# EAGLE board mainboard-v2 (EAGLE 8.0.2)
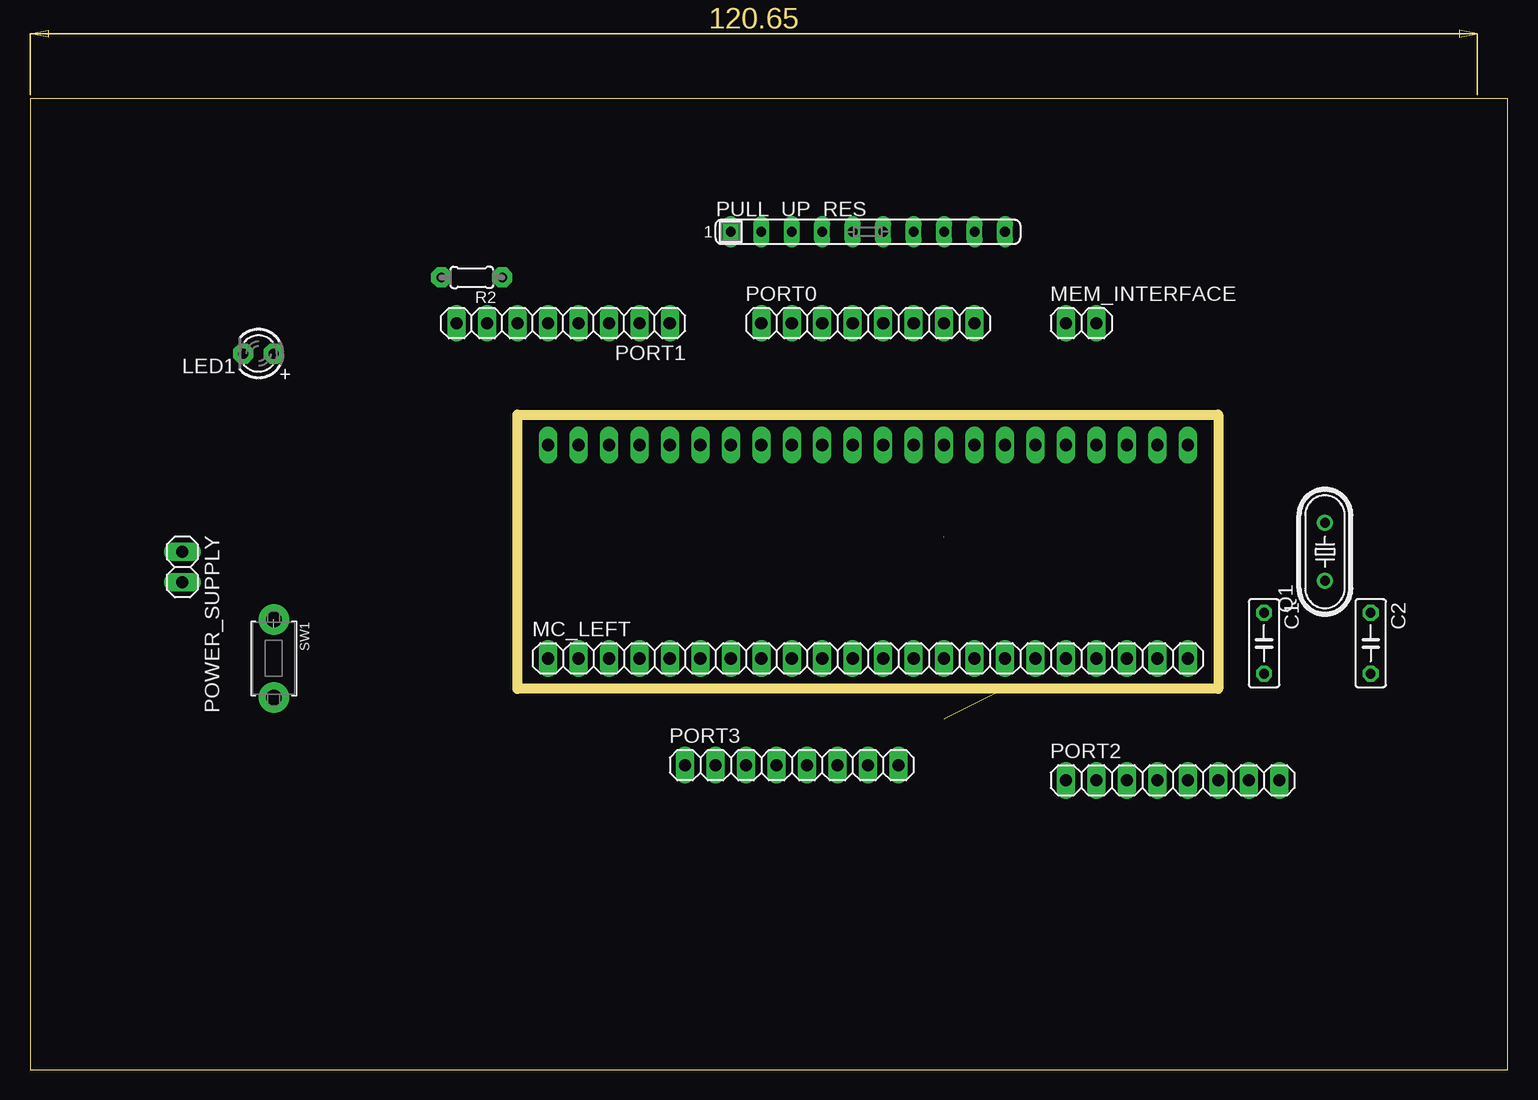
[diagram p0: board, top side]
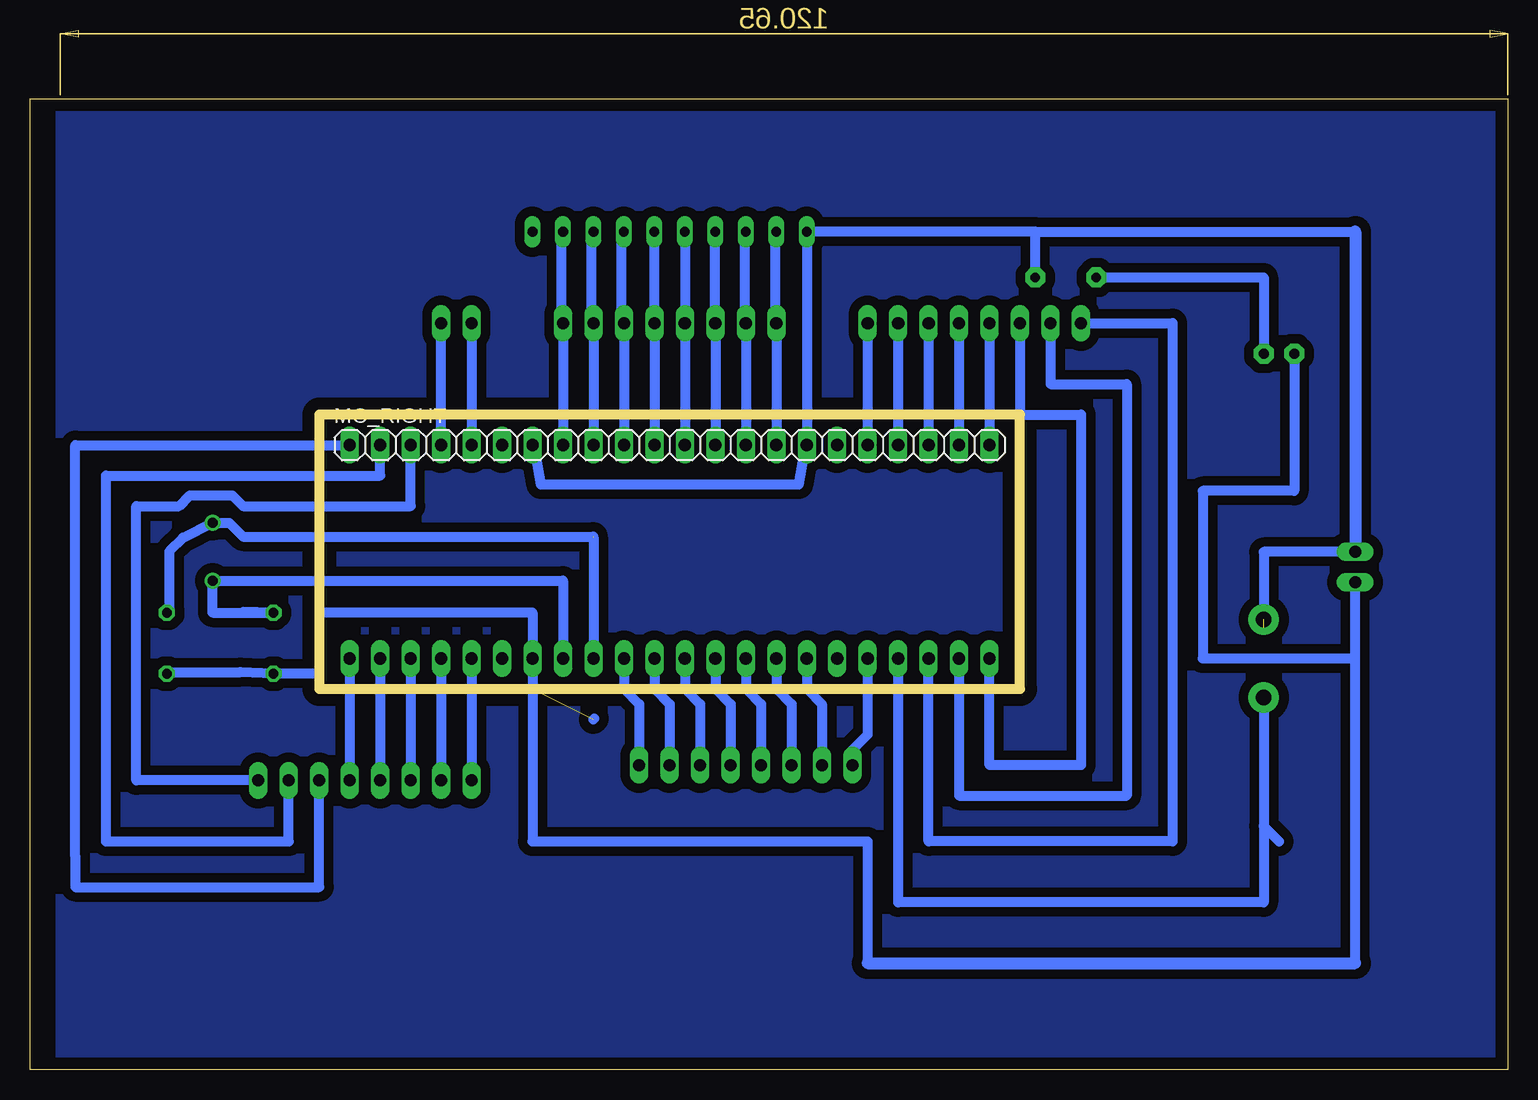
[diagram p1: board, bottom side, seen from below]

Size 123.17 x 80.95 mm. Coordinates in mm from the lower left corner, seen from the top.
Outline: 0,0 123.17,0 123.17,80.95 0,80.95 0,0
Outline: 40.64,54.61 99.06,54.61 99.06,31.75 40.64,31.75 40.64,54.61
Copper layers (1*16): Top 0.035mm / dielectric 1.5mm / Bottom 0.035mm
Design rules "default *": minimum track width 10mil, minimum drill 24mil, track to track 0.8mm, track to pad 1mm, pad to pad 8mil, via to via 8mil, smd to smd 8mil, copper to edge 40mil, drill to drill 8mil, minimum pad ring 10mil, minimum via ring 8mil, stop-mask expansion 4mil, vias tented up to drill 0mil, thermal gap 10mil

## Footprints (pad centres in the part's own frame; a part is rotated, then mirrored left to right if it is on the bottom)
C050-025X075 = drill 0.813 octagon: 1 -2.54,0; 2 2.54,0
LED3MM = drill 0.813 pad 1.676 octagon: A -1.27,0; K 1.27,0
1X22 = drill 1.016 long: 1 -26.67,0; 2 -24.13,0; 3 -21.59,0; 4 -19.05,0; 5 -16.51,0; 6 -13.97,0; 7 -11.43,0; 8 -8.89,0; 9 -6.35,0; 10 -3.81,0; 11 -1.27,0; 12 1.27,0; 13 3.81,0; 14 6.35,0; 15 8.89,0; 16 11.43,0; 17 13.97,0; 18 16.51,0; 19 19.05,0; 20 21.59,0; 21 24.13,0; 22 26.67,0
1X02 = drill 1.016 long: 1 -1.27,0; 2 1.27,0
1X08 = drill 1.016 long: 1 -8.89,0; 2 -6.35,0; 3 -3.81,0; 4 -1.27,0; 5 1.27,0; 6 3.81,0; 7 6.35,0; 8 8.89,0
SIL10 = drill 0.813 long: 1 -11.43,0; 2 -8.89,0; 3 -6.35,0; 4 -3.81,0; 5 -1.27,0; 6 1.27,0; 7 3.81,0; 8 6.35,0; 9 8.89,0; 10 11.43,0
HC49/S = drill 0.813: 1 -2.413,0; 2 2.413,0
0204/5 = drill 0.813 pad 1.676 octagon: 1 -2.54,0; 2 2.54,0
TACT_PANA-EVQ = drill 1.3 pad 2.54: P$1 -3.25,0; P$2 3.25,0

## Placement (x,y rotation side)
C1  33pF  [C050-025X075]  102.87,35.56 270 top
C2  33pF  [C050-025X075]  111.76,35.56 270 top
LED1  [LED3MM]  19.05,59.69 180 top
MC_LEFT  [1X22]  69.85,34.29 0 top
MC_RIGHT  [1X22]  69.85,52.07 0 bottom
MEM_INTERFACE  [1X02]  87.63,62.23 0 top
PORT0  [1X08]  69.85,62.23 0 top
PORT1  [1X08]  44.45,62.23 180 top
PORT2  [1X08]  95.25,24.13 0 top
PORT3  [1X08]  63.5,25.4 0 top
POWER_SUPPLY  [1X02]  12.7,41.91 270 top
PULL_UP_RES  [SIL10]  69.85,69.85 0 top
Q1  22.184Mhz  [HC49/S]  107.95,43.18 90 top
R2  [0204/5]  36.83,66.04 180 top
SW1  [TACT_PANA-EVQ]  20.32,34.29 270 top

## Library data of the parts
C1 C2 LED1 R2 SW1 = adafruit
MC_LEFT MC_RIGHT MEM_INTERFACE PORT0 PORT1-PORT3 POWER_SUPPLY = pinhead
PULL_UP_RES = resistor-sil; OC_FARNELL: unknown; OC_NEWARK: unknown
Q1 = adafruit; OC_FARNELL: 1667008; OC_NEWARK: unknown

## Nets
GND: C1.2 C2.2 LED1.K MC_LEFT.16 POWER_SUPPLY.2
N$1: C2.1 MC_LEFT.14 Q1.2
N$2: C1.1 MC_LEFT.15 Q1.1
N$12: LED1.A R2.2
P0.0: MC_RIGHT.15 PORT0.1 PULL_UP_RES.2
P0.1: MC_RIGHT.14 PORT0.2 PULL_UP_RES.3
P0.2: MC_RIGHT.13 PORT0.3 PULL_UP_RES.4
P0.3: MC_RIGHT.12 PORT0.4 PULL_UP_RES.5
P0.4: MC_RIGHT.11 PORT0.5 PULL_UP_RES.6
P0.5: MC_RIGHT.10 PORT0.6 PULL_UP_RES.7
P0.6: MC_RIGHT.9 PORT0.7 PULL_UP_RES.8
P0.7: MC_RIGHT.8 PORT0.8 PULL_UP_RES.9
P1.0: MC_RIGHT.18 PORT1.1
P1.1: MC_RIGHT.19 PORT1.2
P1.2: MC_RIGHT.20 PORT1.3
P1.3: MC_RIGHT.21 PORT1.4
P1.4: MC_RIGHT.22 PORT1.5
P1.5: MC_LEFT.1 PORT1.6
P1.6: MC_LEFT.2 PORT1.7
P1.7: MC_LEFT.3 PORT1.8
P2.0: MC_LEFT.18 PORT2.1
P2.1: MC_LEFT.19 PORT2.2
P2.2: MC_LEFT.20 PORT2.3
P2.3: MC_LEFT.21 PORT2.4
P2.4: MC_LEFT.22 PORT2.5
P2.5: MC_RIGHT.1 PORT2.6
P2.6: MC_RIGHT.2 PORT2.7
P2.7: MC_RIGHT.3 PORT2.8
P3.0: MC_LEFT.5 PORT3.1
P3.1: MC_LEFT.7 PORT3.2
P3.2: MC_LEFT.8 PORT3.3
P3.3: MC_LEFT.9 PORT3.4
P3.4: MC_LEFT.10 PORT3.5
P3.5: MC_LEFT.11 PORT3.6
P3.6: MC_LEFT.12 PORT3.7
P3.7: MC_LEFT.13 PORT3.8
RST: MC_LEFT.4 SW1.P$2
UC_!PSEN: MC_RIGHT.4 MEM_INTERFACE.2
UC_ALE: MC_RIGHT.5 MEM_INTERFACE.1
VCC: MC_RIGHT.7 MC_RIGHT.16 POWER_SUPPLY.1 PULL_UP_RES.1 R2.1 SW1.P$1

## Tracks (layer width: path | path; a pad name or v marks a point on that pad's centre or on a via)
GND  (1 unrouted)
  Bottom 0.254: 12.57,39.55 POWER_SUPPLY.2
  Bottom 0.813: 12.7,34.29 POWER_SUPPLY.2 | C2.2 111.56,33.15 105.61,33.15 C1.2 99.06,33.02 99.06,38.1 81.28,38.1 MC_LEFT.16 | MC_LEFT.16 81.28,31.75 | 53.34,8.89 53.34,19.05 81.28,19.05 MC_LEFT.16 | LED1.K 17.78,48.26 25.4,48.26 25.4,34.29 12.7,34.29 | 76.2,29.21 76.14,29.27 | 12.7,8.89 12.7,34.29
  Bottom 1.016: 53.34,8.89 12.7,8.89
N$1  (1 unrouted)
  Bottom 0.813: C2.1 111.56,38.18 111.56,43.2 110.41,44.35 Q1.2 106.55,45.59 105.41,44.45 76.2,44.45 | 76.2,44.4 MC_LEFT.14
N$2
  Bottom 0.813: 105.39,38.18 C1.1 107.95,38.1 Q1.1 78.74,40.77 MC_LEFT.15
N$3
  pour Bottom: 0,81.28 120.65,81.28 120.65,0 0,0
N$12
  Bottom 0.813: LED1.A 20.32,66.04 R2.2
P0.0
  Bottom 0.813: PULL_UP_RES.2 61.04,69.72 61.04,62.41 PORT0.1 MC_RIGHT.15
P0.1
  Bottom 0.813: PULL_UP_RES.3 63.55,69.72 63.55,62.41 PORT0.2 MC_RIGHT.14
P0.2
  Bottom 0.813: PULL_UP_RES.4 66.06,69.72 66.06,62.41 PORT0.3 MC_RIGHT.13
P0.3
  Bottom 0.813: PULL_UP_RES.5 PORT0.4 MC_RIGHT.12
P0.4
  Bottom 0.813: PULL_UP_RES.6 71.09,69.72 71.09,62.41 PORT0.5 MC_RIGHT.11
P0.5
  Bottom 0.813: PULL_UP_RES.7 73.84,69.72 73.84,62.41 PORT0.6 MC_RIGHT.10
P0.6
  Bottom 0.813: PULL_UP_RES.8 76.35,69.72 76.35,62.41 PORT0.7 MC_RIGHT.9
P0.7
  Bottom 0.813: PULL_UP_RES.9 78.87,69.72 78.87,62.41 PORT0.8 MC_RIGHT.8
P1.0
  Bottom 0.813: PORT1.1 MC_RIGHT.18
P1.1
  Bottom 0.813: PORT1.2 MC_RIGHT.19
P1.2
  Bottom 0.813: PORT1.3 MC_RIGHT.20
P1.3
  Bottom 0.813: PORT1.4 MC_RIGHT.21
P1.4
  Bottom 0.813: PORT1.5 MC_RIGHT.22
P1.5
  Bottom 0.813: MC_LEFT.1 43.18,25.4 35.56,25.4 35.56,54.61 40.64,54.61 PORT1.6
P1.6
  Bottom 0.813: MC_LEFT.2 45.72,22.86 31.75,22.86 31.75,57.15 38.1,57.15 PORT1.7
P1.7
  Bottom 0.813: PORT1.8 27.94,62.23 27.94,19.05 48.26,19.05 MC_LEFT.3
P2.0
  Bottom 0.813: MC_LEFT.18 PORT2.1
P2.1
  Bottom 0.813: MC_LEFT.19 PORT2.2
P2.2
  Bottom 0.813: MC_LEFT.20 PORT2.3
P2.3
  Bottom 0.813: MC_LEFT.21 PORT2.4
P2.4
  Bottom 0.813: MC_LEFT.22 PORT2.5
P2.5
  Bottom 0.813: MC_RIGHT.1 119.38,52.07 119.38,17.78 119.38,15.24 99.06,15.24 PORT2.6
P2.6
  Bottom 0.813: MC_RIGHT.2 93.98,49.53 116.84,49.53 116.84,19.05 101.6,19.05 PORT2.7
P2.7
  Bottom 0.813: PORT2.8 114.3,24.13 114.3,46.99 110.73,46.99 109.84,47.88 106.3,47.88 105.41,46.99 91.44,46.99 MC_RIGHT.3
P3.0
  Bottom 0.813: MC_LEFT.5 53.34,27.94 54.61,26.67 PORT3.1
P3.1
  Bottom 0.813: MC_LEFT.7 58.42,31.75 57.15,30.48 PORT3.2
P3.2
  Bottom 0.813: MC_LEFT.8 60.96,31.75 59.69,30.48 PORT3.3
P3.3
  Bottom 0.813: MC_LEFT.9 63.5,31.75 62.23,30.48 PORT3.4
P3.4
  Bottom 0.813: MC_LEFT.10 66.04,31.75 64.77,30.48 PORT3.5
P3.5
  Bottom 0.813: MC_LEFT.11 68.58,31.75 67.31,30.48 PORT3.6
P3.6
  Bottom 0.813: MC_LEFT.12 71.12,31.75 69.85,30.48 PORT3.7
P3.7
  Bottom 0.813: MC_LEFT.13 73.66,31.75 72.39,30.48 PORT3.8
RST
  Bottom 0.813: MC_LEFT.4 50.8,13.97 20.32,13.97 20.32,20.32 | SW1.P$2 20.32,20.32 | 20.32,20.32 19.05,19.05
UC_!PSEN
  Bottom 0.813: MC_RIGHT.4 MEM_INTERFACE.2
UC_ALE
  Bottom 0.813: MEM_INTERFACE.1 MC_RIGHT.5
VCC  (1 unrouted)
  Bottom 0.813: MC_RIGHT.7 81.15,51.89 80.59,48.79 59.08,48.79 58.52,51.89 MC_RIGHT.16 PULL_UP_RES.1 | PULL_UP_RES.1 58.29,69.72 | POWER_SUPPLY.1 20.32,43.18 20.32,36.83 | R2.1 39.37,69.85 | 39.37,69.85 PULL_UP_RES.1 | 39.37,69.85 12.7,69.85
  Bottom 1.016: 12.7,69.85 POWER_SUPPLY.1